# EAGLE board Sumador-Restador 4 bits (EAGLE 9.7.0)

Size 127.96 x 60.95 mm. Coordinates in mm from the lower left corner, seen from the top.
Outline: 0,0 127.96,0 127.96,60.95 0,60.95 0,0
Copper layers (1*16): Top 0.035mm / dielectric 1.5mm / Bottom 0.035mm
Design rules "default": minimum track width 6mil, minimum drill 0.35mm, track to track 6mil, track to pad 6mil, pad to pad 6mil, via to via 6mil, smd to smd 6mil, copper to edge 40mil, drill to drill 6mil, minimum pad ring 10mil, minimum via ring 8mil, stop-mask expansion 4mil, vias tented up to drill 0mil, thermal gap 10mil

## Footprints (pad centres in the part's own frame; a part is rotated, then mirrored left to right if it is on the bottom)
LEDRD254W60D565H860B = drill 0.981 pad 1.581: 1 -1.27,0; 2 1.27,0
LEDRD254W60D565H860B_B = drill 0.981 pad 1.581: 1 -1.27,0; 2 1.27,0
BATTERY-GENERIC = drill 1.118 pad 3.15 octagon: + 2.54,0; - -2.54,0
RESAD1016W63L850D250B = drill 0.83 pad 1.43: 1 -5.08,0; 2 5.08,0
SWITCH-SPDT-PTH-8.5X3.7MM = drill 1.016 pad 1.88: 1 -2.54,0; 2 0,0; 3 2.54,0
78B04ST = drill 0.8: 1 -3.81,-3.81; 2 -1.27,-3.81; 3 1.27,-3.81; 4 3.81,-3.81; 5 3.81,3.81; 6 1.27,3.81; 7 -1.27,3.81; 8 -3.81,3.81
DIP762W53P254L1969H508Q16B = drill 0.743 pad 1.343: 1 -3.81,8.89; 2 -3.81,6.35; 3 -3.81,3.81; 4 -3.81,1.27; 5 -3.81,-1.27; 6 -3.81,-3.81; 7 -3.81,-6.35; 8 -3.81,-8.89; 9 3.81,-8.89; 10 3.81,-6.35; 11 3.81,-3.81; 12 3.81,-1.27; 13 3.81,1.27; 14 3.81,3.81; 15 3.81,6.35; 16 3.81,8.89
DIP762W53P254L1969H508Q14B = drill 0.743 pad 1.343: 1 -3.81,7.62; 2 -3.81,5.08; 3 -3.81,2.54; 4 -3.81,0; 5 -3.81,-2.54; 6 -3.81,-5.08; 7 -3.81,-7.62; 8 3.81,-7.62; 9 3.81,-5.08; 10 3.81,-2.54; 11 3.81,0; 12 3.81,2.54; 13 3.81,5.08; 14 3.81,7.62

## Placement (x,y rotation side)
D1  RED  [LEDRD254W60D565H860B]  116.82,16.59 180 top
D2  RED  [LEDRD254W60D565H860B]  121.9,16.59 180 top
D3  RED  [LEDRD254W60D565H860B]  111.74,16.59 180 top
D4  RED  [LEDRD254W60D565H860B]  106.66,16.59 180 top
D6  BLUE  [LEDRD254W60D565H860B_B]  101.58,16.59 180 top
P1  BATTERYGENERIC  [BATTERY-GENERIC]  49.8,52.7 180 top
R1  1k  [RESAD1016W63L850D250B]  6.33,26.75 90 top
R2  1k  [RESAD1016W63L850D250B]  8.87,26.75 90 top
R3  1k  [RESAD1016W63L850D250B]  11.41,26.75 90 top
R4  1k  [RESAD1016W63L850D250B]  13.95,26.75 90 top
R5  1k  [RESAD1016W63L850D250B]  21.57,26.75 90 top
R6  1k  [RESAD1016W63L850D250B]  24.11,26.75 90 top
R7  1k  [RESAD1016W63L850D250B]  26.65,26.75 90 top
R8  1k  [RESAD1016W63L850D250B]  29.19,26.75 90 top
R9  1k  [RESAD1016W63L850D250B]  87.61,8.97 90 top
R10  1k  [RESAD1016W63L850D250B]  90.15,8.97 90 top
R11  1k  [RESAD1016W63L850D250B]  92.69,8.97 90 top
R12  1k  [RESAD1016W63L850D250B]  95.23,8.97 90 top
R13  1k  [RESAD1016W63L850D250B]  36.81,26.75 90 top
R14  1k  [RESAD1016W63L850D250B]  97.77,8.97 90 top
S1  TOGGLE  [SWITCH-SPDT-PTH-8.5X3.7MM]  34.03,8.62 0 top
SW1  SPST-478B04ST  [78B04ST]  10.14,10.24 0 top
SW2  SPST-478B04ST  [78B04ST]  25.38,10.24 0 top
U2  74HC283_PDIP  [DIP762W53P254L1969H508Q16B]  71.1,10.24 90 top
U3  74HC86_PDIP  [DIP762W53P254L1969H508Q14B]  49.51,10.24 90 top

## Library data of the parts
D1-D4 = Tinkercad; CATEGORY: Opto-Electronic; SUB-CATEGORY: LED; VALUE: LED_RED
D6 = Tinkercad; CATEGORY: Opto-Electronic; SUB-CATEGORY: LED; VALUE: LED_BLUE
P1 R1-R14 S1 SW1 SW2 U2 U3 = Tinkercad

## Nets
D1_A: D1.1 R12.2
D2_A: D2.1 R14.2
D3_A: D3.1 R11.2
D4_A: D4.1 R10.2
D6_A: D6.1 R9.2
P1+: P1.+ S1.2 SW1.1 SW1.2 SW1.3 SW1.4 SW2.1 SW2.2 SW2.3 SW2.4 U2.16 U3.14
P1-: D1.2 D2.2 D3.2 D4.2 D6.2 P1.- R1.2 R2.2 R3.2 R4.2 R5.2 R6.2 R7.2 R8.2 R13.2 U2.8 U3.7
U2_A0: R4.1 SW1.5 U2.5
U2_A1: R3.1 SW1.6 U2.3
U2_A2: R2.1 SW1.7 U2.14
U2_A3: R1.1 SW1.8 U2.12
U2_COUT: R9.1 U2.9
U2_S0: R14.1 U2.4
U2_S1: R12.1 U2.1
U2_S2: R11.1 U2.13
U2_S3: R10.1 U2.10
U3_1A: R8.1 SW2.5 U3.1
U3_1Y: U2.6 U3.3
U3_2A: R7.1 SW2.6 U3.4
U3_2B: R13.1 S1.3 U2.7 U3.2 U3.5 U3.10 U3.13
U3_2Y: U2.2 U3.6
U3_3A: R6.1 SW2.7 U3.9
U3_3Y: U2.15 U3.8
U3_4A: R5.1 SW2.8 U3.12
U3_4Y: U2.11 U3.11

## Tracks (layer width: path | path; a pad name or v marks a point on that pad's centre or on a via)
D1_A  (1 unrouted)
D2_A  (1 unrouted)
D3_A  (1 unrouted)
D4_A  (1 unrouted)
D6_A  (1 unrouted)
P1+  (11 unrouted)
P1-  (16 unrouted)
U2_A0  (2 unrouted)
U2_A1  (2 unrouted)
U2_A2  (2 unrouted)
U2_A3  (2 unrouted)
U2_COUT  (1 unrouted)
U2_S0  (1 unrouted)
U2_S1  (1 unrouted)
U2_S2  (1 unrouted)
U2_S3  (1 unrouted)
U3_1A  (2 unrouted)
U3_1Y  (1 unrouted)
U3_2A  (2 unrouted)
U3_2B  (6 unrouted)
U3_2Y  (1 unrouted)
U3_3A  (2 unrouted)
U3_3Y  (1 unrouted)
U3_4A  (2 unrouted)
U3_4Y  (1 unrouted)